# Altium PCB UF_Servo.PcbDoc (part 12 of 12)
Units mm, origin at the board's own origin, x right, y up, seen from the top; angles counter-clockwise.
Board outline 222.63 x 100.1 mm, 6 copper layers (L1, L2, L3, L4, L5, L6), stack 1.609 mm thick; 1138 components, 775 nets, 3720 pads, 1641 vias.
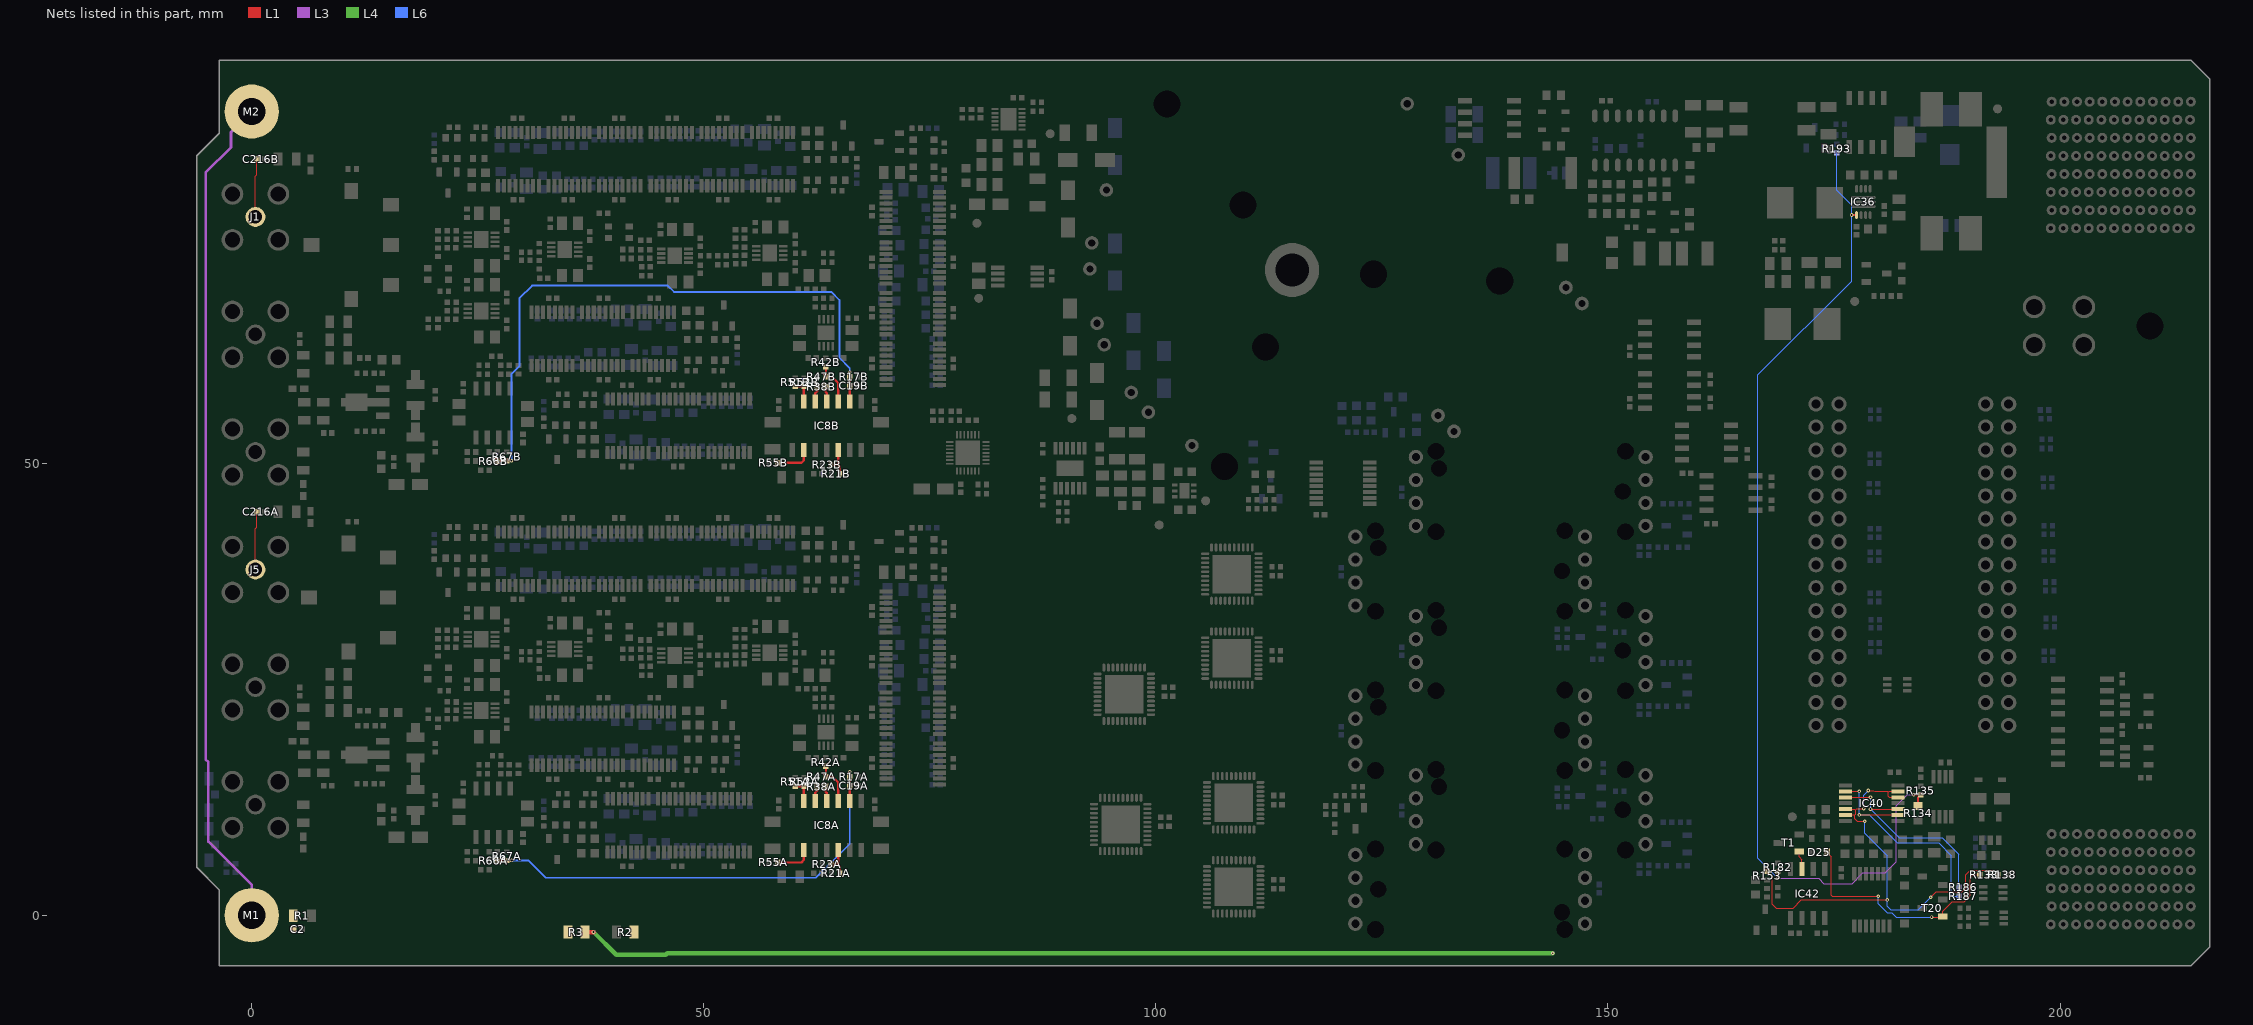
[diagram p13: the nets of this part, all layers, seen from the top]

## Via types
v1: diameter 0.4, hole 0.2, L1 to L6, tented both sides, 1545 vias
v2: diameter 0.4, hole 0.2, L1 to L6, 84 vias
v3: diameter 0.5, hole 0.25, L1 to L6, tented both sides, 12 vias

## Nets (pads, with @x,y where several pads share a name; then routed paths per layer and width w, separated by ;. In a path a pad name is that pad's centre, name@x,y a point inside that pad or via, vN(x,y) a via of type N, cw(c..) or ccw(c..) an arc to the next point about the centre after c; other vN are vias at no path point) (continued)
PSU_EN: IC36.8 R134.1 R135.2 R182.2 R193.2 | length 112.5
  L1 w0.125: v1(168.794,4.156) R182.2@168.794,4.886
  L1 w0.2: v1(176.944,77.506) IC36.8@177.494,77.506 ; v1(183.824,13.386) R135.2@184.574,13.386 ; R134.1@184.294,12.156 184.294,13.078 184.384,13.168 184.384,13.196 R135.2@184.574,13.386 ; R135.2@184.594,13.386 R135.2@184.574,13.386
  L3 w0.125: v1(168.794,4.156) 173.294,4.156 173.894,3.556 176.994,3.556 178.194,4.756 180.694,4.756 181.894,5.956 181.894,12.156 183.124,13.386 v1(183.824,13.386)
  L6 w0.125: v1(168.794,4.156) 166.594,6.356 166.594,59.856 176.944,70.206 v1(176.944,77.506) 176.944,78.606 175.294,80.256 R193.2@175.294,84.386
RF_IN_A: C216A.1 J5.1 | length 6.5
  L1 w0.132: J5.1@0.4,38.3 0.4,42.8 0.55,42.95 C216A.1@0.55,44.7
RF_IN_B: C216B.1 J1.1 | length 6.5
  L1 w0.132: J1.1@0.4,77.3 0.4,81.8 0.55,81.95 C216B.1@0.55,83.7
RST: IC42.3 T1.1 | length 2.1
  L1 w0.125: T1.1@171.144,7.106 171.144,6.506 171.459,6.191 IC42.3@171.459,5.156
RSTn: D25.1 R133.1 T20.1 | length 26.3
  L1 w0.125: D25.1@174.244,7.056 174.244,6.956 174.694,6.506 174.694,2.256 174.794,2.156 v1(179.894,2.156) ; v1(185.794,-0.144) 186.994,-0.144 T20.1@187.044,-0.094 187.044,0.506 188.094,1.556 189.394,1.556 190.094,2.256 190.094,4.256 190.394,4.556 R133.1@191.124,4.556
  L6 w0.125: v1(179.894,2.156) 179.894,1.356 180.894,0.356 181.394,0.356 181.894,-0.144 v1(185.794,-0.144)
SERVMOD_3V3: IC40.5 IC40.6 IC40.12 IC40.13 R138.1 R153.2 | length 55.5
  L1 w0.125: R153.2@167.594,4.926 167.614,4.926 167.841,4.698 167.841,4.678 168.194,4.326 168.194,1.256 168.594,0.856 170.494,0.856 171.394,1.756 v1(180.894,1.756) ; IC40.6@176.294,11.156 177.294,11.156 ; IC40.5@176.294,11.806 177.294,11.806 177.394,11.706 ; v1(178.294,11.856) 177.544,11.856 177.394,11.706 ; v1(178.394,10.456) 177.594,10.456 177.294,10.756 177.294,11.156 ; v1(178.794,13.856) 179.394,13.856 179.494,13.756 180.894,13.756 180.994,13.656 ; IC40.12@182.094,13.106 181.094,13.106 180.994,13.206 180.994,13.656 ; IC40.13@182.094,13.756 181.094,13.756 180.994,13.656 ; v1(185.694,2.056) 186.294,2.656 189.194,2.656 189.594,3.056 189.594,4.556 190.094,5.056 192.624,5.056 192.876,4.803 192.896,4.803 193.124,4.576 R138.1@193.124,4.556 ; 177.294,11.156 177.394,11.256 177.394,11.706
  L6 w0.125: v1(178.294,11.856) 178.294,13.356 v1(178.794,13.856) ; v1(178.394,10.456) 178.394,9.156 180.894,6.656 v1(180.894,1.756) 180.894,1.056 181.294,0.656 184.294,0.656 v1(185.694,2.056)
STRIP1: C2.1 M1.1 M2.1 R1.1 R3.2 | length 93.1
  L3 w0.3: M2.1@-0.006,88.956 -2.3,86.662 -2.3,85 -5.1,82.2 -5.1,17.3 -4.8,17 -4.8,8.2 0,3.4 M1.1@0,0.062
STRIP2: R2.1
STRIP3: R3.1 | length 108.1
  L1 w0.5: R3.1@36.85,-1.8 v1(37.8,-1.8)
  L4 w0.5: v1(37.8,-1.8) 40.3,-4.3 45.8,-4.3 45.956,-4.144 v1(143.894,-4.144)
Switch_I2C.SCL: IC40.2 IC40.9 R187.2 | length 25.7
  L1 w0.125: IC40.2@176.294,13.756 v1(177.794,13.756) ; v1(177.794,11.156) IC40.9@182.094,11.156
  L6 w0.125: v1(177.794,13.756) v1(177.794,11.156) 178.894,11.156 181.994,8.056 186.594,8.056 187.994,6.656 187.994,2.356 188.194,2.156 R187.2@188.824,2.156
Switch_I2C.SDA: IC40.3 IC40.10 R186.2 | length 22.6
  L1 w0.125: IC40.3@176.294,13.106 v1(179.044,13.106) ; v1(179.044,11.806) IC40.10@182.094,11.806
  L6 w0.125: v1(179.044,13.106) v1(179.044,11.806) 182.194,8.656 186.994,8.656 188.824,6.826 R186.2@188.824,3.156
VCA_FBA: IC8A.12 R21A.1 R23A.1 | length 3.5
  L1 w0.25: R23A.1@64.07,5.7 64.8,5.7 ; IC8A.12@64.87,7.3 64.87,5.77 64.8,5.7 ; R21A.1@65.07,4.7 65.07,5.43 64.8,5.7
VCA_FBB: IC8B.12 R21B.1 R23B.1 | length 3.5
  L1 w0.25: R23B.1@64.07,49.9 64.8,49.9 ; IC8B.12@64.87,51.5 64.87,49.97 64.8,49.9 ; R21B.1@65.07,48.9 65.07,49.63 64.8,49.9
VCA_IN+A: IC8A.3 R42A.1 R47A.2 | length 4.8
  L1 w0.25: R42A.1@63.5,16.53 63.5,15.43 R47A.2@63.47,15.4 64.2,15.4 64.87,14.73 IC8A.3@64.87,12.7
VCA_IN+B: IC8B.3 R42B.1 R47B.2 | length 4.8
  L1 w0.25: R42B.1@63.5,60.73 63.5,59.63 R47B.2@63.47,59.6 64.2,59.6 64.87,58.93 IC8B.3@64.87,56.9
VCA_IN-A: IC8A.6 R51A.2 R52A.2 | length 2.6
  L1 w0.25: R51A.2@60.1,14.33 R52A.2@61.1,14.33 61.06,14.29 IC8A.6@61.06,12.7
VCA_IN-B: IC8B.6 R51B.2 R52B.2 | length 2.6
  L1 w0.25: R51B.2@60.1,58.53 R52B.2@61.1,58.53 61.06,58.49 IC8B.6@61.06,56.9
VCA_REFA: IC8A.9 R55A.1 | length 4.1
  L1 w0.25: R55A.1@58.17,5.9 60.8,5.9 61.06,6.16 IC8A.9@61.06,7.3
VCA_REFB: IC8B.9 R55B.1 | length 4.1
  L1 w0.25: R55B.1@58.17,50.1 60.8,50.1 61.06,50.36 IC8B.9@61.06,51.5
VCA_RG+A: IC8A.4 R38A.2 | length 1.7
  L1 w0.25: R38A.2@63.47,14.3 63.47,13.73 63.6,13.6 IC8A.4@63.6,12.7
VCA_RG+B: IC8B.4 R38B.2 | length 1.7
  L1 w0.25: R38B.2@63.47,58.5 63.47,57.93 63.6,57.8 IC8B.4@63.6,56.9
VCA_RG-A: IC8A.5 R38A.1 | length 1.7
  L1 w0.25: IC8A.5@62.33,12.7 62.33,13.63 62.53,13.83 R38A.1@62.53,14.3
VCA_RG-B: IC8B.5 R38B.1 | length 1.7
  L1 w0.25: IC8B.5@62.33,56.9 62.33,57.83 62.53,58.03 R38B.1@62.53,58.5
VCA_VGA: C19A.1 IC8A.2 R17A.2 R66A.2 R67A.2 | length 52.5
  L1 w0.25: R66A.2@27.17,6.1 28.17,6.1 R67A.2@28.2,6.13 ; R17A.2@66.13,15.4 66.14,15.39 IC8A.2@66.14,12.7
  L1 w0.3: R67A.2@28.2,6.13 v1(28.73,6.13) ; R17A.2@66.14,15.39 v1(66.14,15.92)
  L6 w0.2: v1(28.73,6.13) 30.57,6.13 32.5,4.2 62.4,4.2 66.14,7.94 v1(66.14,15.92)
VCA_VGB: C19B.1 IC8B.2 R17B.2 R66B.2 R67B.2 | length 68.2
  L1 w0.25: R66B.2@27.17,50.3 28.17,50.3 R67B.2@28.2,50.33 ; R17B.2@66.13,59.6 66.14,59.59 IC8B.2@66.14,56.9
  L1 w0.3: R67B.2@28.2,50.33 v1(28.73,50.33) ; R17B.2@66.14,59.59 v1(66.14,60.12)
  L6 w0.2: v1(28.73,50.33) 28.73,59.93 29.6,60.8 29.6,68.3 31,69.7 46,69.7 46.7,69 64.1,69 65,68.1 65,61.7 66.14,60.56 v1(66.14,60.12)
pads on no net: B36.1 B37.1 B38.1 B39.1 B40.1 B41.1 BUSH1.1 D23.5 D24.4 D24.5 D27.5 IC2A.6 IC2B.6 IC3A.6 IC3B.6 IC4A.6 IC4B.6 IC5A.6 IC5B.6 IC7A.6 IC7B.6 IC8A.13 IC8B.13 IC9.5 IC9.6 IC10.7 IC13.3 IC13.4 IC13.6 IC14A.6 IC14B.6 IC15A.12 IC15B.12 IC15C.12 IC15D.12 IC15E.12 IC15F.12 IC15G.12 IC15H.12 IC16A.12 IC16B.12 IC16C.12 IC16D.12 IC16E.12 IC16F.12 IC16G.12 IC16H.12 IC17A.12 IC17B.12 IC17C.12 IC17D.12 IC17E.12 IC17F.12 IC17G.12 IC17H.12 IC21A.12 IC21B.12 IC22A.12 IC22B.12 IC23A.12 IC23B.12 IC24A.12 IC24B.12 IC26.5 IC26.9 IC26.10 IC26.11 IC26.12 IC26.13 IC26.14 IC27.5 IC27.9 IC27.10 IC27.11 IC27.12 IC27.13 IC27.14 IC28.5 IC28.9 IC28.10 IC28.11 IC28.12 IC28.13 IC28.14 IC29.5 IC29.9 IC29.10 IC29.11 IC29.12 IC29.13 IC29.14 IC30.9 IC30.13 IC33.5 IC33.9 IC33.10 IC33.11 IC33.12 IC33.13 IC33.14 IC34.5 IC34.9 IC34.10 IC34.11 IC34.12 IC34.13 IC34.14 IC38.4 IC39.10 IC39.11 IC39.20 IC39.31 IC43.5 IC44.7 IC45.5 IC46.7 IC47.11 IC47.20 IC47.31 IC48.11 IC48.20 IC48.31 IC49.11 IC49.20 IC49.31 IC50.11 IC50.20 IC50.31 IC53.2 IC54.7 IC58.8 IC58.9 IC58.10 IC58.11 IC58.20 IC58.31 J2.5 J6.B1 J6.G3 J6.H3 J6.I2 J6.J3 J6.K3 J6.L2 J7.A3 J7.A5 J7.A7 J7.A8 J7.B2 J7.B3 J7.B4 J7.B5 J7.B6 J7.B7 J7.B8 J7.C2 J7.C4 J7.C6 J7.C8 J7.D3 J7.D5 J7.D7 J7.D8 J7.E2 J7.E3 J7.E4 J7.E5 J7.E6 J7.E7 J7.E8 J7.F2 J7.F4 J7.F6 J7.F8 J7.G3 J7.G5 J7.G7 J7.H2 J7.H3 J7.H4 J7.H5 J7.H6 J7.H7 J7.H8 J7.I2 J7.I4 J7.I6 J7.I8 J7.J3 J7.J5 J7.J7 J7.K2 J7.K3 J7.K4 J7.K5 J7.K6 J7.K7 J7.K8 J7.L2 J7.L4 J7.L6 J7.L8 LD9.3 LD11.3 Tr1.5 Tr1.6 Tr1.9 Tr1.10
copper on no net:
  other v1: 214.694,-3.744

## Polygon pours and split planes (outlines as drawn)
GND on L6 "GND_L06_P171" (solid, pour order 171): 96.275,86.05 94.15,86.05 94,86.2 94,88.1 94.15,88.25 96.275,88.25
GND on L6 "GND_L06_P170" (solid, pour order 170): 96.275,69.15 94.15,69.15 94,69.3 94,71.2 94.15,71.35 96.275,71.35
GND on L6 "GND_L06_P169" (solid, pour order 169): 98.275,64.45 96.15,64.45 96,64.6 96,66.5 96.15,66.65 98.275,66.65
GND on L6 "GND_L06_P168" (solid, pour order 168): 101.675,61.35 99.55,61.35 99.4,61.5 99.4,63.4 99.55,63.55 101.675,63.55
NetC10A_2 on L6 "NETC10A_2_L06_P156" (solid, pour order 156): 30 vertices, not listed, extent 70.54,14.19 75.56,36.825
NetC10B_2 on L6 "NETC10B_2_L06_P155" (solid, pour order 155): 30 vertices, not listed, extent 70.54,58.39 75.56,81.025
GND on L6 "GND_L06_P137" (solid, pour order 137): 19 vertices, not listed, extent 38.925,7.44 55.41,12.46
NetC39B_2 on L6 "NETC39B_2_L06_P136" (solid, pour order 136): 19 vertices, not listed, extent 30.59,17.14 47.075,22.16
NetC39D_2 on L6 "NETC39D_2_L06_P135" (solid, pour order 135): 19 vertices, not listed, extent 43.79,37.04 60.275,42.06
NetC39C_2 on L6 "NETC39C_2_L06_P114" (solid, pour order 114): 19 vertices, not listed, extent 26.825,36.94 43.31,41.96
GND on L6 "GND_L06_P112" (solid, pour order 112): 19 vertices, not listed, extent 38.925,51.64 55.41,56.66
NetC39F_2 on L6 "NETC39F_2_L06_P111" (solid, pour order 111): 19 vertices, not listed, extent 30.59,61.34 47.075,66.36
NetC39H_2 on L6 "NETC39H_2_L06_P110" (solid, pour order 110): 19 vertices, not listed, extent 43.79,81.24 60.275,86.26
NetC39G_2 on L6 "NETC39G_2_L06_P078" (solid, pour order 78): 19 vertices, not listed, extent 26.825,81.14 43.31,86.16
STRIP2 on L6 "esd1" (solid, pour order 57): 66.643,-3.181 65.257,-3.181 42.58,-3.181 42.58,-4.45 97.58,-4.45 97.58,-3.181
STRIP1 on L6 "esd1" (solid, pour order 54): -2.17,1.04 4.955,1.04 4.955,-2.9 37.58,-2.9 37.58,-4.4 -2.17,-4.4
P12V0_EEM on L6 "L6-P12V0_EEM" (solid, pour order 50): 48 vertices, not listed, extent 168.494,5.246 195.594,90.756
P12V0_DIOT on L6 "P12V0_DIOT_L06_P033" (solid, pour order 33): 45 vertices, not listed, extent 191.294,-2.744 215.894,8.866
NetC172_2 on L6 "NETC172_2_L06_P031" (solid, pour order 31): 17 vertices, not listed, extent 184.594,61.556 198.994,78.956
NetC172_1 on L6 "NETC172_1_L06_P030" (solid, pour order 30): 200.994,68.256 197.894,71.356 192.619,71.356 188.344,75.631 188.344,78.606 188.694,78.956 190.994,78.956 195.894,74.056 199.694,74.056 204.494,69.256 204.494,62.056 203.994,61.556 201.494,61.556 200.994,62.056
GND_DIOT on L6 "GND_DIOT_L06_P027" (solid, pour order 27): 181.669,86.606 181.669,83.881 182.494,83.056 188.869,83.056 188.869,85.356 186.469,85.356 185.219,86.606
NetC137_2 on L6 "NETC137_2_L06_P016" (solid, pour order 16): 152.794,75.156 151.194,76.756 140.994,76.756 137.994,79.756 137.994,83.906 134.944,83.906 133.894,84.956 132.994,84.956 132.294,84.256 132.294,79.456 140.194,71.556 152.494,71.556 152.794,71.856 152.794,73.956
GND_LLC on L6 "GND_LLC_L06_P014" (solid, pour order 14): 147.194,80.656 146.994,80.456 145.194,80.456 144.944,80.706 144.944,83.706 145.194,83.956 146.994,83.956 147.194,83.756
LLC_OUT on L6 "LLC_OUT_L06_P012" (solid, pour order 12): 144.494,86.656 143.794,85.956 140.394,85.956 140.194,86.156 140.194,87.356 141.294,88.456 151.194,88.456 151.694,87.956 151.694,86.656 151.494,86.456 150.394,86.456 150.194,86.656
NetC137_1 on L6 "NETC137_1_L06_P008" (solid, pour order 8): 20 vertices, not listed, extent 137.594,80.406 144.444,89.456
GND_LLC on L6 "GND_LLC_L06_P005" (solid, pour order 5): 136.169,89.556 136.169,86.481 136.994,85.656 136.994,84.956 136.594,84.556 134.894,84.556 134.294,85.156 134.294,89.256 134.594,89.556
P12V0_LLC on L6 "P12V0_LLC_L06_P004" (solid, pour order 4): 133.169,85.456 130.694,85.456 130.394,85.756 130.394,88.356 130.694,88.656 131.694,88.656 132.019,88.981 132.019,89.556 133.169,89.556
STRIP3 on L6 "STRIP3_L06_P002" (solid, pour order 2): 215.107,-4.456 215.124,-4.456 216.364,-3.216 117.574,-3.216 117.574,-4.456
GND_DIOT on L6 "GND_DIOT_L06_P000" (solid, pour order 0): 202.194,47.77 202.194,41.845 216.194,41.845 216.194,47.77
GND_DIOT on L1 "GND_DIOT_L01_P184" (solid, pour order 184): 40.85,-1.075 39.125,-1.075 39,-1.2 39,-2.4 39.125,-2.525 40.85,-2.525
GND_DIOT on L1 "GND_DIOT_L01_P183" (solid, pour order 183): 5.24,-1.19 5.7,-0.73 5.7,-0.2 5.7,0.4 6,0.7 7.075,0.7 7.4,0.375 7.4,-1.8 7,-2.2 5.4,-2.2 5.24,-2.04
P5V0 on L1 "P5V0_L01_P177" (solid, pour order 177): 75.8,46.1 75.9,46 77.5,46 77.6,46.1 77.6,47 78.04,47.44 78.71,47.44 78.71,48.06 78.5,48.27 78.5,49.6 78.3,49.6 78.3,48.6 78,48.3 76.275,48.3 75.8,47.825
GND on L1 "GND_L01_P178" (solid, pour order 178): 73.2,47.825 73.2,46.1 73.3,46 74.9,46 75,46.1 75,47.825
GND on L1 "GND_L01_P176" (solid, pour order 176): 17 vertices, not listed, extent 78.29,87.8 82.6,88.6
GND on L1 "GND_L01_P175" (solid, pour order 175): 93.475,85.7 91.8,85.7 91.7,85.8 91.7,87.4 91.8,87.5 93.475,87.5
GND on L1 "GND_L01_P174" (solid, pour order 174): 87.125,58 88.8,58 88.9,57.9 88.9,56.3 88.8,56.2 87.125,56.2
GND on L1 "GND_L01_P173" (solid, pour order 173): 87.125,60.4 88.8,60.4 88.9,60.3 88.9,58.7 88.8,58.6 87.125,58.6
GND on L1 "GND_L01_P172" (solid, pour order 172): 86,77.925 86,79.6 86.1,79.7 87.7,79.7 87.8,79.6 87.8,77.925
GND on L1 "GND_L01_P167" (solid, pour order 167): 20 vertices, not listed, extent 101.8,44.425 104.425,49.575
P3V3_ISO on L1 "P3V3_ISO_L01_P166" (solid, pour order 166): 103.9,46.525 103.9,46 103.475,45.575 103.475,43.925 103.7,43.7 106.1,43.7 106.4,44 106.4,46 105.875,46.525
GND on L1 "GND_L01_P164" (solid, pour order 164): 68.7,9.825 68.59,9.935 68.59,12.16 70.24,12.16 70.5,11.9 70.5,9.825
P5V0 on L1 "L1-P5V0" (solid, pour order 163): 19 vertices, not listed, extent 67.11,6.525 70.5,13.7
GND on L1 "GND_L01_P162" (solid, pour order 162): 31.225,11.65 31.225,13.375 31.1,13.5 29.9,13.5 29.775,13.375 29.775,11.65
GND on L1 "GND_L01_P161" (solid, pour order 161): 22.175,11.15 22.175,9.425 22.3,9.3 23.5,9.3 23.625,9.425 23.625,11.15
P5V0 on L1 "P5V0_L01_P160" (solid, pour order 160): 31.225,10.95 28.65,10.95 28.305,10.605 28.305,7.925 28.905,7.925 28.905,8.405 29.24,8.74 31.04,8.74 31.225,8.925
N5V0 on L1 "N5V0_L01_P159" (solid, pour order 159): 22.175,11.85 24.75,11.85 25.095,12.195 25.095,14.875 24.495,14.875 24.495,14.395 24.16,14.06 22.36,14.06 22.175,13.875
GND on L1 "GND_L01_P158" (solid, pour order 158): 31.225,55.85 31.225,57.575 31.1,57.7 29.9,57.7 29.775,57.575 29.775,55.85
GND on L1 "GND_L01_P157" (solid, pour order 157): 22.175,55.35 22.175,53.625 22.3,53.5 23.5,53.5 23.625,53.625 23.625,55.35
GND on L1 "GND_L01_P153" (solid, pour order 153): 81.95,80.175 81.9,80.125 81.9,78.075 83.7,78.075 83.7,79.3 84.975,80.575 84.975,82.375 85.325,82.725 85.325,84.4 85.225,84.5 85.225,85.875 85.175,85.925 81.95,85.925
GND on L1 "GND_L01_P152" (solid, pour order 152): 37 vertices, not listed, extent 87.19,43.39 100.925,51.49
P5V0 on L1 "P5V0_L01_P151" (solid, pour order 151): 31.225,55.15 28.65,55.15 28.305,54.805 28.305,52.125 28.905,52.125 28.905,52.605 29.24,52.94 31.04,52.94 31.225,53.125
N5V0 on L1 "N5V0_L01_P150" (solid, pour order 150): 22.175,56.05 24.75,56.05 25.095,56.395 25.095,59.075 24.495,59.075 24.495,58.595 24.16,58.26 22.36,58.26 22.175,58.075
GND on L1 "GND_L01_P149" (solid, pour order 149): 16.01,11.34 14.91,11.34 14.775,11.475 13.825,11.475 13.825,12.925 13.9,13 15.9,13 16.01,12.89
GND on L1 "GND_L01_P148" (solid, pour order 148): 16.01,50.34 14.91,50.34 14.775,50.475 13.825,50.475 13.825,51.925 13.9,52 15.9,52 16.01,51.89
GND on L1 "GND_L01_P147" (solid, pour order 147): 17.7,48.325 17.7,46.6 17.8,46.5 19.4,46.5 19.5,46.6 19.5,48.325
GND on L1 "GND_L01_P146" (solid, pour order 146): 17.7,9.325 17.7,7.6 17.8,7.5 19.4,7.5 19.5,7.6 19.5,9.325
GND on L1 "GND_L01_P145" (solid, pour order 145): 5.1,16.275 5.1,14.6 5.2,14.5 6.4,14.5 6.5,14.6 6.5,16.275
GND on L1 "GND_L01_P144" (solid, pour order 144): 10.125,24 11.8,24 11.9,24.1 11.9,25.3 11.8,25.4 10.125,25.4
GND on L1 "GND_L01_P143" (solid, pour order 143): 23 vertices, not listed, extent 9.4,14.29 16,21.31
P5V0 on L1 "P5V0_L01_P142" (solid, pour order 142): 18 vertices, not listed, extent 13,7.4 19.1,12.15
GND on L1 "GND_L01_P141" (solid, pour order 141): 5.1,55.275 5.1,53.6 5.2,53.5 6.4,53.5 6.5,53.6 6.5,55.275
GND on L1 "GND_L01_P140" (solid, pour order 140): 10.125,63 11.8,63 11.9,63.1 11.9,64.3 11.8,64.4 10.125,64.4
GND on L1 "GND_L01_P134" (solid, pour order 134): 58.5,9.825 58.61,9.935 58.61,12.16 56.96,12.16 56.7,11.9 56.7,9.825
N5V0 on L1 "L1-N5V0" (solid, pour order 133): 19 vertices, not listed, extent 56.7,6.525 60.09,13.7
GND on L1 "GND_L01_P132" (solid, pour order 132): 25.65,19.075 25.65,21.225 26.2,21.775 26.2,23.8 25.65,24.35 25.65,26.325 24.55,26.325 24.55,23.675 24.6,23.625 24.6,20.575 24.55,20.525 24.55,19.075
GND on L1 "GND_L01_P131" (solid, pour order 131): 25.65,26.975 25.65,29.125 26.2,29.675 26.2,31.7 25.65,32.25 25.65,34.225 24.55,34.225 24.55,31.575 24.6,31.525 24.6,28.475 24.55,28.425 24.55,26.975
GND on L1 "GND_L01_P130" (solid, pour order 130): 34.85,25.875 34.85,28.025 35.4,28.575 35.4,30.6 34.85,31.15 34.85,33.125 33.75,33.125 33.75,30.475 33.8,30.425 33.8,27.375 33.75,27.325 33.75,25.875
GND on L1 "GND_L01_P129" (solid, pour order 129): 47.05,25.175 47.05,27.325 47.6,27.875 47.6,29.9 47.05,30.45 47.05,32.425 45.95,32.425 45.95,29.775 46,29.725 46,26.675 45.95,26.625 45.95,25.175
GND on L1 "GND_L01_P128" (solid, pour order 128): 57.55,25.475 57.55,27.625 58.1,28.175 58.1,30.2 57.55,30.75 57.55,32.725 56.45,32.725 56.45,30.075 56.5,30.025 56.5,26.975 56.45,26.925 56.45,25.475
GND on L1 "GND_L01_P127" (solid, pour order 127): 59.875,20.05 62.025,20.05 62.575,19.5 64.6,19.5 65.15,20.05 67.125,20.05 67.125,21.15 64.475,21.15 64.425,21.1 61.375,21.1 61.325,21.15 59.875,21.15
N5V0 on L1 "N5V0_L01_P126" (solid, pour order 126): 59.875,18.25 61.85,18.25 62.14,17.96 62.14,17.19 62.76,17.19 62.9,17.33 62.9,19.275 62.225,19.275 61.7,19.8 60,19.8 59.875,19.675
P5V0 on L1 "P5V0_L01_P125" (solid, pour order 125): 67.125,18.25 65.15,18.25 64.86,17.96 64.86,17.19 64.24,17.19 64.1,17.33 64.1,19.275 64.775,19.275 65.3,19.8 67,19.8 67.125,19.675
P5V0 on L1 "P5V0_L01_P124" (solid, pour order 124): 59.35,32.725 59.35,30.75 59.64,30.46 60.41,30.46 60.41,29.84 60.27,29.7 58.325,29.7 58.325,30.375 57.8,30.9 57.8,32.6 57.925,32.725
P5V0 on L1 "P5V0_L01_P123" (solid, pour order 123): 48.85,32.425 48.85,30.45 49.14,30.16 49.91,30.16 49.91,29.54 49.77,29.4 47.825,29.4 47.825,30.075 47.3,30.6 47.3,32.3 47.425,32.425
P5V0 on L1 "P5V0_L01_P122" (solid, pour order 122): 36.65,33.125 36.65,31.15 36.94,30.86 37.71,30.86 37.71,30.24 37.57,30.1 35.625,30.1 35.625,30.775 35.1,31.3 35.1,33 35.225,33.125
P5V0 on L1 "P5V0_L01_P121" (solid, pour order 121): 27.45,34.225 27.45,32.25 27.74,31.96 28.51,31.96 28.51,31.34 28.37,31.2 26.425,31.2 26.425,31.875 25.9,32.4 25.9,34.1 26.025,34.225
P5V0 on L1 "P5V0_L01_P120" (solid, pour order 120): 27.45,26.325 27.45,24.35 27.74,24.06 28.51,24.06 28.51,23.44 28.37,23.3 26.425,23.3 26.425,23.975 25.9,24.5 25.9,26.2 26.025,26.325
N5V0 on L1 "N5V0_L01_P119" (solid, pour order 119): 27.45,19.075 27.45,21.05 27.74,21.34 28.51,21.34 28.51,21.96 28.37,22.1 26.425,22.1 26.425,21.425 25.9,20.9 25.9,19.2 26.025,19.075
N5V0 on L1 "N5V0_L01_P118" (solid, pour order 118): 36.65,25.875 36.65,27.85 36.94,28.14 37.71,28.14 37.71,28.76 37.57,28.9 35.625,28.9 35.625,28.225 35.1,27.7 35.1,26 35.225,25.875
N5V0 on L1 "N5V0_L01_P117" (solid, pour order 117): 48.85,25.175 48.85,27.15 49.14,27.44 49.91,27.44 49.91,28.06 49.77,28.2 47.825,28.2 47.825,27.525 47.3,27 47.3,25.3 47.425,25.175
N5V0 on L1 "N5V0_L01_P116" (solid, pour order 116): 59.35,25.475 59.35,27.45 59.64,27.74 60.41,27.74 60.41,28.36 60.27,28.5 58.325,28.5 58.325,27.825 57.8,27.3 57.8,25.6 57.925,25.475
N5V0 on L1 "N5V0_L01_P115" (solid, pour order 115): 27.45,26.975 27.45,28.95 27.74,29.24 28.51,29.24 28.51,29.86 28.37,30 26.425,30 26.425,29.325 25.9,28.8 25.9,27.1 26.025,26.975
GND on L1 "GND_L01_P109" (solid, pour order 109): 21 vertices, not listed, extent 79.675,69.5 88.81,72.3
DAC_VREF on L1 "DAC_VREF_L01_P108" (solid, pour order 108): 78.1,53.6 77.1,53.6 76.56,54.14 76.56,56.11 75.98,56.11 75.94,56.07 75.94,53.56 76.7,52.8 78.1,52.8
P2V5_REF on L1 "P2V5_REF_L01_P107" (solid, pour order 107): 19 vertices, not listed, extent 79.1,67.5 83.25,71.25
GND on L1 "GND_L01_P106" (solid, pour order 106): 68.7,54.025 68.59,54.135 68.59,56.36 70.24,56.36 70.5,56.1 70.5,54.025
GND on L1 "GND_L01_P105" (solid, pour order 105): 58.5,54.025 58.61,54.135 58.61,56.36 56.96,56.36 56.7,56.1 56.7,54.025
P5V0 on L1 "L1-P5V0 1" (solid, pour order 104): 19 vertices, not listed, extent 67.11,50.725 70.5,57.9
N5V0 on L1 "L1-N5V0 1" (solid, pour order 103): 19 vertices, not listed, extent 56.7,50.725 60.09,57.9
GND on L1 "GND_L01_P100" (solid, pour order 100): 23 vertices, not listed, extent 9.4,53.29 16,60.31
GND on L1 "GND_L01_P096" (solid, pour order 96): 25.65,63.275 25.65,65.425 26.2,65.975 26.2,68 25.65,68.55 25.65,70.525 24.55,70.525 24.55,67.875 24.6,67.825 24.6,64.775 24.55,64.725 24.55,63.275
GND on L1 "GND_L01_P095" (solid, pour order 95): 25.65,71.175 25.65,73.325 26.2,73.875 26.2,75.9 25.65,76.45 25.65,78.425 24.55,78.425 24.55,75.775 24.6,75.725 24.6,72.675 24.55,72.625 24.55,71.175
GND on L1 "GND_L01_P094" (solid, pour order 94): 34.85,70.075 34.85,72.225 35.4,72.775 35.4,74.8 34.85,75.35 34.85,77.325 33.75,77.325 33.75,74.675 33.8,74.625 33.8,71.575 33.75,71.525 33.75,70.075
GND on L1 "GND_L01_P093" (solid, pour order 93): 47.05,69.375 47.05,71.525 47.6,72.075 47.6,74.1 47.05,74.65 47.05,76.625 45.95,76.625 45.95,73.975 46,73.925 46,70.875 45.95,70.825 45.95,69.375
GND on L1 "GND_L01_P092" (solid, pour order 92): 57.55,69.675 57.55,71.825 58.1,72.375 58.1,74.4 57.55,74.95 57.55,76.925 56.45,76.925 56.45,74.275 56.5,74.225 56.5,71.175 56.45,71.125 56.45,69.675
GND on L1 "GND_L01_P091" (solid, pour order 91): 59.875,64.25 62.025,64.25 62.575,63.7 64.6,63.7 65.15,64.25 67.125,64.25 67.125,65.35 64.475,65.35 64.425,65.3 61.375,65.3 61.325,65.35 59.875,65.35
N5V0 on L1 "N5V0_L01_P090" (solid, pour order 90): 59.875,62.45 61.85,62.45 62.14,62.16 62.14,61.39 62.76,61.39 62.9,61.53 62.9,63.475 62.225,63.475 61.7,64 60,64 59.875,63.875
P5V0 on L1 "P5V0_L01_P089" (solid, pour order 89): 67.125,62.45 65.15,62.45 64.86,62.16 64.86,61.39 64.24,61.39 64.1,61.53 64.1,63.475 64.775,63.475 65.3,64 67,64 67.125,63.875
P5V0 on L1 "P5V0_L01_P088" (solid, pour order 88): 59.35,76.925 59.35,74.95 59.64,74.66 60.41,74.66 60.41,74.04 60.27,73.9 58.325,73.9 58.325,74.575 57.8,75.1 57.8,76.8 57.925,76.925
P5V0 on L1 "P5V0_L01_P087" (solid, pour order 87): 48.85,76.625 48.85,74.65 49.14,74.36 49.91,74.36 49.91,73.74 49.77,73.6 47.825,73.6 47.825,74.275 47.3,74.8 47.3,76.5 47.425,76.625
P5V0 on L1 "P5V0_L01_P086" (solid, pour order 86): 36.65,77.325 36.65,75.35 36.94,75.06 37.71,75.06 37.71,74.44 37.57,74.3 35.625,74.3 35.625,74.975 35.1,75.5 35.1,77.2 35.225,77.325
P5V0 on L1 "P5V0_L01_P085" (solid, pour order 85): 27.45,78.425 27.45,76.45 27.74,76.16 28.51,76.16 28.51,75.54 28.37,75.4 26.425,75.4 26.425,76.075 25.9,76.6 25.9,78.3 26.025,78.425
P5V0 on L1 "P5V0_L01_P084" (solid, pour order 84): 27.45,70.525 27.45,68.55 27.74,68.26 28.51,68.26 28.51,67.64 28.37,67.5 26.425,67.5 26.425,68.175 25.9,68.7 25.9,70.4 26.025,70.525
N5V0 on L1 "N5V0_L01_P083" (solid, pour order 83): 27.45,63.275 27.45,65.25 27.74,65.54 28.51,65.54 28.51,66.16 28.37,66.3 26.425,66.3 26.425,65.625 25.9,65.1 25.9,63.4 26.025,63.275
N5V0 on L1 "N5V0_L01_P082" (solid, pour order 82): 36.65,70.075 36.65,72.05 36.94,72.34 37.71,72.34 37.71,72.96 37.57,73.1 35.625,73.1 35.625,72.425 35.1,71.9 35.1,70.2 35.225,70.075
N5V0 on L1 "N5V0_L01_P081" (solid, pour order 81): 48.85,69.375 48.85,71.35 49.14,71.64 49.91,71.64 49.91,72.26 49.77,72.4 47.825,72.4 47.825,71.725 47.3,71.2 47.3,69.5 47.425,69.375
N5V0 on L1 "N5V0_L01_P080" (solid, pour order 80): 59.35,69.675 59.35,71.65 59.64,71.94 60.41,71.94 60.41,72.56 60.27,72.7 58.325,72.7 58.325,72.025 57.8,71.5 57.8,69.8 57.925,69.675
N5V0 on L1 "N5V0_L01_P079" (solid, pour order 79): 27.45,71.175 27.45,73.15 27.74,73.44 28.51,73.44 28.51,74.06 28.37,74.2 26.425,74.2 26.425,73.525 25.9,73 25.9,71.3 26.025,71.175
P5V0 on L1 "P5V0_L01_P077" (solid, pour order 77): 18 vertices, not listed, extent 13,46.4 19.1,51.15
P5V0 on L1 "P5V0_L01_P076" (solid, pour order 76): 97.375,44.95 97.375,47.45 99.625,47.45 99.675,47.4 100.925,47.4 100.925,44.825 100.5,44.4 97.925,44.4
LT3045_P5V0 on L1 "LT3045_P5V0_L01_P075" (solid, pour order 75): 96.825,47.45 96.825,44.95 96.775,44.9 94.7,44.9 93.9,45.7 90.9,45.7 90.825,45.775 90.825,46.175 90.6,46.4 90.6,48 92.8,48 93.35,47.45
P6V0 on L1 "P6V0_L01_P073" (solid, pour order 73): 48 vertices, not listed, extent 82.9,47.475 102.925,70.66
N5V0 on L1 "N5V0_L01_P062" (solid, pour order 62): 81.25,81.625 78.55,81.625 78.5,81.575 78.5,78.5 78.925,78.075 81.1,78.075 81.1,80.025 81.25,80.175
N6V0 on L1 "N6V0_L01_P059" (solid, pour order 59): 25 vertices, not listed, extent 82.825,79.15 91.8,89.325
LT3094_N5V0 on L1 "LT3094_N5V0_L01_P058" (solid, pour order 58): 80.15,82.375 80,82.225 78.5,82.225 78.5,83.6 79.9,85 79.9,86.7 80.8,87.6 81.65,87.6 81.8,87.75 81.8,88 82.6,88 82.6,86.85 82.175,86.85 81.25,85.925 81.25,82.375
STRIP2 on L1 "esd1" (solid, pour order 56): 42.58,-3.181 41.924,-2.525 41.75,-2.525 41.75,-1.075 42.75,-1.075 42.75,-1.25 44.681,-3.181 53.919,-3.181 65.257,-3.181 66.643,-3.181 97.58,-3.181 97.58,-4.45 42.58,-4.45
STRIP1 on L1 "esd1" (solid, pour order 55): 35.6,-3.038 35.45,-2.888 35.45,-1.075 34.45,-1.075 34.45,-2.888 34.3,-3.038 4.955,-3.038 4.955,1.625 -2.17,1.625 -2.17,-4.4 37.58,-4.4 37.58,-3.038
P3V3_MP on L1 "P3V3_MP_L01_P048" (solid, pour order 48): 193.144,14.806 192.894,15.056 192.894,16.156 193.094,16.356 194.094,16.356 194.294,16.156 194.294,15.056 194.044,14.806
P3V3_DIOT on L1 "P3V3_DIOT_L01_P047" (solid, pour order 47): 191.644,10.406 191.644,12.081 191.894,12.331 191.894,15.056 191.644,15.306 189.544,15.306 188.894,14.656 188.894,14.156 188.294,13.556 188.294,12.556 188.894,11.956 190.594,11.956 191.044,11.506 191.044,10.406
GND_DIOT on L1 "GND_DIOT_L01_P042" (solid, pour order 42): 177.019,79.606 178.544,79.606 178.844,79.906 178.844,80.681 180.269,80.681 180.494,80.456 180.494,79.556 180.244,79.306 177.019,79.306
GND_DIOT on L1 "GND_DIOT_L01_P041" (solid, pour order 41): 178.844,77.781 178.994,77.931 179.044,77.981 182.894,77.981 182.894,76.456 182.794,76.356 181.594,76.356 180.994,76.956 179.119,76.956 178.844,77.231
P12V0_EEM on L1 "P12V0_EEM_L01_P032" (solid, pour order 32): 178.244,78.606 180.024,78.606 180.894,79.476 180.894,80.556 181.194,80.856 183.294,80.856 183.494,80.656 183.494,80.156 183.994,79.656 183.994,78.956 183.234,78.196 180.234,78.196 180.124,78.306 178.244,78.306
NetC172_2 on L1 "NETC172_2_L01_P029" (solid, pour order 29): 184.544,73.606 184.544,78.606 184.894,78.956 186.694,78.956 187.044,78.606 187.044,73.606
NetC172_1 on L1 "NETC172_1_L01_P028" (solid, pour order 28): 188.844,73.606 188.844,78.606 189.194,78.956 190.994,78.956 191.344,78.606 191.344,73.606
GND_DIOT on L1 "GND_DIOT_L01_P026" (solid, pour order 26): 17 vertices, not listed, extent 181.644,79.406 194.144,91.106
P12V0_EEM on L1 "P12V0_EEM_L01_P025" (solid, pour order 25): 177.659,91.521 177.894,91.756 186.594,91.756 187.044,91.306 187.044,87.306 184.544,87.306 184.544,88.106 184.194,88.456 178.294,88.456 177.659,89.091
NetB15_1 on L1 "NETB15_1_L01_P024" (solid, pour order 24): 170.944,87.486 175.764,87.486 176.894,86.356 180.594,86.356 180.799,86.151 180.799,84.281 180.474,83.956 171.794,83.956 170.944,84.806 170.944,86.286
GND_DIOT on L1 "GND_DIOT_L01_P023" (solid, pour order 23): 172.819,69.356 172.819,71.256 173.194,71.631 173.194,72.881 171.394,72.881 171.094,72.581 171.094,69.556 171.294,69.356 171.769,69.356
P3V3 on L1 "P3V3_L01_P022" (solid, pour order 22): 172.744,63.706 172.744,67.506 173.569,68.331 173.569,70.756 173.994,71.181 173.994,72.881 176.669,72.881 176.994,72.556 176.994,70.256 175.694,68.956 175.694,63.706
3V3 on L1 "3V3_L01_P021" (solid, pour order 21): 169.034,74.966 167.594,76.406 167.594,80.606 170.544,80.606 170.544,71.781 170.219,71.456 170.219,69.456 170.244,69.431 170.244,63.706 167.294,63.706 167.294,67.206 167.544,67.206 169.169,68.831 169.169,72.856 169.034,72.991
GND_DIOT on L1 "GND_DIOT_L01_P020" (solid, pour order 20): 167.369,69.456 167.369,70.381 166.594,71.156 166.594,74.556 167.004,74.966 168.754,74.966 168.754,73.191 168.419,72.856 168.419,69.456
NetIC36_2 on L1 "NETIC36_2_L01_P019" (solid, pour order 19): 173.044,77.106 175.994,77.106 176.394,77.506 176.394,78.456 176.744,78.806 178.244,78.806 178.244,79.106 176.744,79.106 176.394,79.456 176.394,80.206 175.994,80.606 173.044,80.606
GND_DIOT on L1 "GND_DIOT_L01_P018" (solid, pour order 18): 172.944,88.826 172.944,90.101 172.994,90.151 172.994,90.576 172.844,90.726 171.044,90.726 170.894,90.576 170.894,90.151 170.944,90.101 170.944,88.826
GND_DIOT on L1 "GND_DIOT_L01_P017" (solid, pour order 17): 175.294,88.881 175.294,90.031 175.394,90.131 175.394,90.656 175.294,90.756 173.494,90.756 173.394,90.656 173.394,90.131 173.494,90.031 173.494,88.881
NetC137_2 on L1 "NETC137_2_L01_P015" (solid, pour order 15): 154.169,71.906 152.244,71.906 152.094,72.056 152.094,74.456 152.244,74.606 154.169,74.606
GND_LLC on L1 "GND_LLC_L01_P013" (solid, pour order 13): 145.294,80.406 147.044,80.406 147.194,80.556 147.194,83.756 147.044,83.906 145.294,83.906
P12V0_LLC on L1 "P12V0_LLC_L01_P011" (solid, pour order 11): 160.944,83.106 161.094,82.956 162.894,82.956 163.194,83.256 163.194,85.356 163.594,85.756 164.914,85.756 165.444,86.286 165.444,87.486 161.149,87.486 160.894,87.231 160.894,85.506 160.944,85.456
LLC_VCC on L1 "LLC_VCC_L01_P010" (solid, pour order 10): 154.419,87.231 153.929,87.721 153.929,88.481 153.329,88.481 153.329,86.321 153.994,85.656 158.644,85.656 159.394,84.906 159.394,84.506 159.344,84.456 160.244,84.456 160.244,85.456 160.294,85.506 160.294,87.231
GND_LLC on L1 "GND_LLC_L01_P009" (solid, pour order 9): 17 vertices, not listed, extent 155.394,88.481 165.444,91.456
NetC137_1 on L1 "NETC137_1_L01_P007" (solid, pour order 7): 138.994,80.406 139.244,80.156 139.244,78.756 140.144,78.756 140.144,80.256 140.294,80.406 142.844,80.406 142.994,80.556 142.994,83.756 142.844,83.906 138.994,83.906
LLC_OUT on L1 "LLC_OUT_L01_P006" (solid, pour order 6): 20 vertices, not listed, extent 126.694,86.051 140.369,90.956
P12V0_LLC on L1 "P12V0_LLC_L01_P003" (solid, pour order 3): 134.969,87.921 132.729,87.921 131.994,88.656 130.694,88.656 130.394,88.356 130.394,85.756 130.694,85.456 134.594,85.456 134.969,85.831 134.969,86.651
STRIP3 on L1 "STRIP3_L01_P001" (solid, pour order 1): 215.107,-4.456 215.124,-4.456 216.364,-3.216 117.574,-3.216 117.574,-4.456
P3V3_ISO on L4 "P3V3_ISO_L04_P182" (solid, pour order 182): 100.4,47.3 103.4,44.3 103.4,31.2 98.7,26.5 98.7,6.4 102.9,2.2 126.3,2.2 132.8,8.7 132.8,51.4 127.2,57 78.4,57 76.8,55.4 76.8,48.8 78.3,47.3
N5V0 on L4 "N5V0_L04_P181" (solid, pour order 181): 107 vertices, not listed, extent 5.4,-2.4 87.1,93.6
P5V0 on L4 "P5V0_L04_P180" (solid, pour order 180): 94 vertices, not listed, extent 12.1,3.6 100.9,90.1
P12V0_LLC on L4 "P12V0_LLC_L04_P051" (solid, pour order 51): 133.594,79.756 155.094,79.756 155.794,80.456 161.194,80.456 163.694,82.956 163.694,90.856 162.294,92.256 132.094,92.256 129.794,89.956 129.794,83.556
P3V3_MP on L4 "P3V3_MP_L04_P049" (solid, pour order 49): 29 vertices, not listed, extent 183.194,10.356 210.694,22.256
P3V3_DIOT on L4 "P3V3_DIOT_L04_P046" (solid, pour order 46): 24 vertices, not listed, extent 165.794,-2.644 191.994,13.756
P3V3 on L4 "P3V3_L04_P045" (solid, pour order 45): 38 vertices, not listed, extent 143.294,-2.244 176.994,72.856
GND on L5 (split plane): 30 vertices, not listed, extent -5.585,-4.99 216.023,94.09
GND_DIOT on L2 (split plane): 166.046,84.052 162.998,81.005 162.976,80.972 162.969,80.933 162.969,72.375 159.951,69.358 152.094,69.358 152.055,69.35 152.022,69.328 145.915,63.221 124.437,84.699 124.437,94.09 166.046,94.09
GND_DIOT on L2 (split plane): 42 vertices, not listed, extent -3.398,-2.098 135.96,94.09
GND_DIOT on L2 (split plane): 80 vertices, not listed, extent -5.585,-4.99 216.023,94.09

## Keep-outs
Keep-Out Layer:
  region: 202.475,43.094 215.912,43.094 215.912,45.994 202.475,45.994

## Other copper
L1:
  rectangle net GND_DIOT: 202.674,42.817 216.162,46.296
L2 (plane layer: these items are gaps in the copper):
  region: 9.094,-0.844 43.144,-0.844 45.344,-3.044 46.044,-3.744 141.694,-3.744 142.635,-2.803 142.635,44.004 144.462,45.831 146.762,45.831 148.562,47.631 148.562,60.431 147.337,61.656 153.037,67.356 161.094,67.356 165.594,71.856 165.594,79.956 168.512,82.874 168.512,94.594 166.148,94.594 166.148,84.01 163.071,80.933 163.071,72.333 159.994,69.256 152.094,69.256 145.915,63.077 124.335,84.657 124.335,94.544 97.225,94.544 97.225,69.168 107.662,58.731 132.662,58.731 136.062,55.331 136.062,50.831 133.562,48.331 133.562,6.231 132.062,4.731 126.402,4.731 124.602,2.931 124.602,0.864 124.292,0.554 124.292,-2.2 45.5,-2.2 43.5,-0.2 9.3,-0.2 1.3,7.8 -2.1,7.8 -3.5,9.2 -3.5,81.2 2.9,87.6 2.9,94.594 2.1,94.594 2.1,87.8 -4.3,81.4 -4.3,9.2 -2.3,7.2 1.049,7.2
  lines w0.2: 145.915,63.077 145.915,63.077 ; 145.915,63.077 124.335,84.657 124.335,94.544 97.225,94.544 97.225,69.168 107.662,58.731 132.662,58.731 136.062,55.331 136.062,50.831 133.562,48.331 133.562,6.231 132.062,4.731 128.062,4.731 126.402,4.731 124.602,2.931 124.602,0.864 124.292,0.554 124.292,-2.2 45.5,-2.2 43.5,-0.2 9.3,-0.2 1.3,7.8 -2.1,7.8 -3.5,9.2 -3.5,81.2 2.9,87.6 2.9,94.594 2.1,94.594 2.1,87.8 -4.3,81.4 -4.3,9.2 -2.3,7.2 1.049,7.2 9.094,-0.844 43.144,-0.844 45.344,-3.044 46.044,-3.744 141.694,-3.744 142.635,-2.803 142.635,44.004 144.462,45.831 146.762,45.831 148.562,47.631 148.562,60.431 147.337,61.656 153.037,67.356 161.094,67.356 165.594,71.856 165.594,79.956 168.512,82.874 168.512,94.594 166.148,94.594 166.148,84.01 163.071,80.933 163.071,72.333 159.994,69.256 152.094,69.256 ; 145.915,63.077 152.094,69.256 ; 152.094,69.256 152.094,69.256

## Silkscreen, mask and mechanical layers (free items; w line width, h text height)
Top Overlay:
  text "GND" at 192.194,90.167 h1
  text "GND" at 176.594,66.367 h1
  text "WUT ISE 2025" at 201.869,31.831 h1.02
  text "Licensed under CERN-OHL-W v2" at 201.144,28.306 h1
  text "GND" at 169.394,11.867 h1
Top Solder:
  region: 202.475,46.299 202.475,42.799 216.437,42.799 216.437,46.299
Bottom Solder:
  region: 202.475,46.299 202.475,42.799 216.437,42.799 216.437,46.299
Mechanical 1:
  lines w0.1: -6.096,45.061 -3.606,47.55 ; -3,92.1 -2.844,92.256 132.094,92.256 ; -6.096,5.371 -6.096,17.196 -6.096,84.061 -3.606,86.55 -3.606,94.601 214.504,94.601 216.533,92.571 216.533,-3.471 214.504,-5.5 -3.606,-5.5 -3.606,2.849 -6.096,5.371

## Text inside footprints (layer, text, board x,y; h text height)
J2: Top Overlay "1" at 201.689,69.72 h1.2 r270; Mechanical 14 "1" at 201.689,69.72 h1.2 r270
J6: Drill Drawing "PRESS-FIT TECHNOLOGY" at 215.127,11.544 h1 r180; Drill Drawing "Diam. 0.5mm +/-0.05" at 215.127,13.044 h1 r180; Mechanical 14 "A" at 214.877,-4.156 h1 r90; Mechanical 14 "B" at 213.477,-4.156 h1 r90; Mechanical 14 "C" at 212.077,-4.156 h1 r90; Mechanical 14 "D" at 210.677,-3.156 h1 r90; Mechanical 14 "E" at 209.277,-3.156 h1 r90; Mechanical 14 "F" at 207.877,-3.156 h1 r90; Mechanical 14 "G" at 206.477,-3.156 h1 r90; Mechanical 14 "H" at 205.077,-3.156 h1 r90; Mechanical 14 "I" at 203.677,-2.906 h1 r90; Mechanical 14 "J" at 202.277,-3.156 h1 r90; Mechanical 14 "K" at 200.877,-3.156 h1 r90; Mechanical 14 "L" at 199.477,-3.156 h1 r90; Mechanical 14 "1" at 194.427,-1.306 h1 r90; Mechanical 14 "2" at 194.427,0.694 h1 r90; Mechanical 14 "3" at 194.427,2.694 h1 r90; Mechanical 14 "4" at 194.427,4.694 h1 r90; Mechanical 14 "5" at 194.427,6.694 h1 r90; Mechanical 14 "6" at 194.427,8.694 h1 r90; Mechanical 8 "Top Surface of Mother Board" at 228.727,-0.331 h0.5 r90; Mechanical 8 "Edge of Daugher Card" at 217.227,0.819 h0.5 r90
J7: Top Overlay "L" at 199.473,73.844 h1 r90; Top Overlay "K" at 200.877,73.844 h1 r90; Top Overlay "J" at 202.273,73.844 h1 r90; Top Overlay "I" at 203.677,74.094 h1 r90; Top Overlay "H" at 205.077,73.844 h1 r90; Top Overlay "G" at 206.477,73.844 h1 r90; Top Overlay "F" at 207.877,73.115 h1 r90; Top Overlay "E" at 209.277,73.17 h1 r90; Top Overlay "D" at 210.677,73.844 h1 r90; Top Overlay "C" at 212.077,72.844 h1 r90; Top Overlay "B" at 213.477,72.646 h1 r90; Top Overlay "A" at 214.88,72.844 h1 r90; Drill Drawing "Diam. 0.5mm +/-0.05" at 215.127,94.044 h1 r180; Drill Drawing "PRESS-FIT TECHNOLOGY" at 215.127,92.544 h1 r180; Mechanical 14 "7" at 194.427,87.694 h1 r90; Mechanical 14 "8" at 194.427,89.694 h1 r90; Mechanical 14 "6" at 194.427,85.694 h1 r90; Mechanical 14 "5" at 194.427,83.694 h1 r90; Mechanical 14 "4" at 194.427,81.694 h1 r90; Mechanical 14 "3" at 194.427,79.694 h1 r90; Mechanical 14 "2" at 194.427,77.694 h1 r90; Mechanical 14 "1" at 194.427,75.694 h1 r90; Mechanical 14 "L" at 199.477,73.844 h1 r90; Mechanical 14 "K" at 200.877,73.844 h1 r90; Mechanical 14 "J" at 202.277,73.844 h1 r90; Mechanical 14 "I" at 203.677,74.094 h1 r90; Mechanical 14 "H" at 205.077,73.844 h1 r90; Mechanical 14 "G" at 206.477,73.844 h1 r90; Mechanical 14 "F" at 207.877,73.844 h1 r90; Mechanical 14 "E" at 209.277,73.844 h1 r90; Mechanical 14 "D" at 210.677,73.844 h1 r90; Mechanical 14 "C" at 212.077,72.844 h1 r90; Mechanical 14 "B" at 213.477,72.844 h1 r90; Mechanical 14 "A" at 214.877,72.844 h1 r90; Mechanical 8 "Edge of Daugher Card" at 217.227,79.819 h0.5 r90; Mechanical 8 "Top Surface of Mother Board" at 228.727,78.669 h0.5 r90
J8: Mechanical 14 "30" at 195.717,21.679 h1.02 r270
J9: Top Overlay "30" at 178.762,21.678 h1.02 r270; Mechanical 14 "30" at 176.947,21.678 h1.02 r270
LD9: Mechanical 8 "K" at -4.971,11.928 h0.5 r270
LD11: Mechanical 8 "K" at -4.971,6.416 h0.5 r270